# Altium PCB dast.PcbDoc
Units mm, origin at the board's own origin, x right, y up, seen from the top; angles counter-clockwise.
Board outline 151 x 86.38 mm, 2 copper layers (Top Layer, Bottom Layer); 47 components, 52 nets, 143 pads, 0 vias.
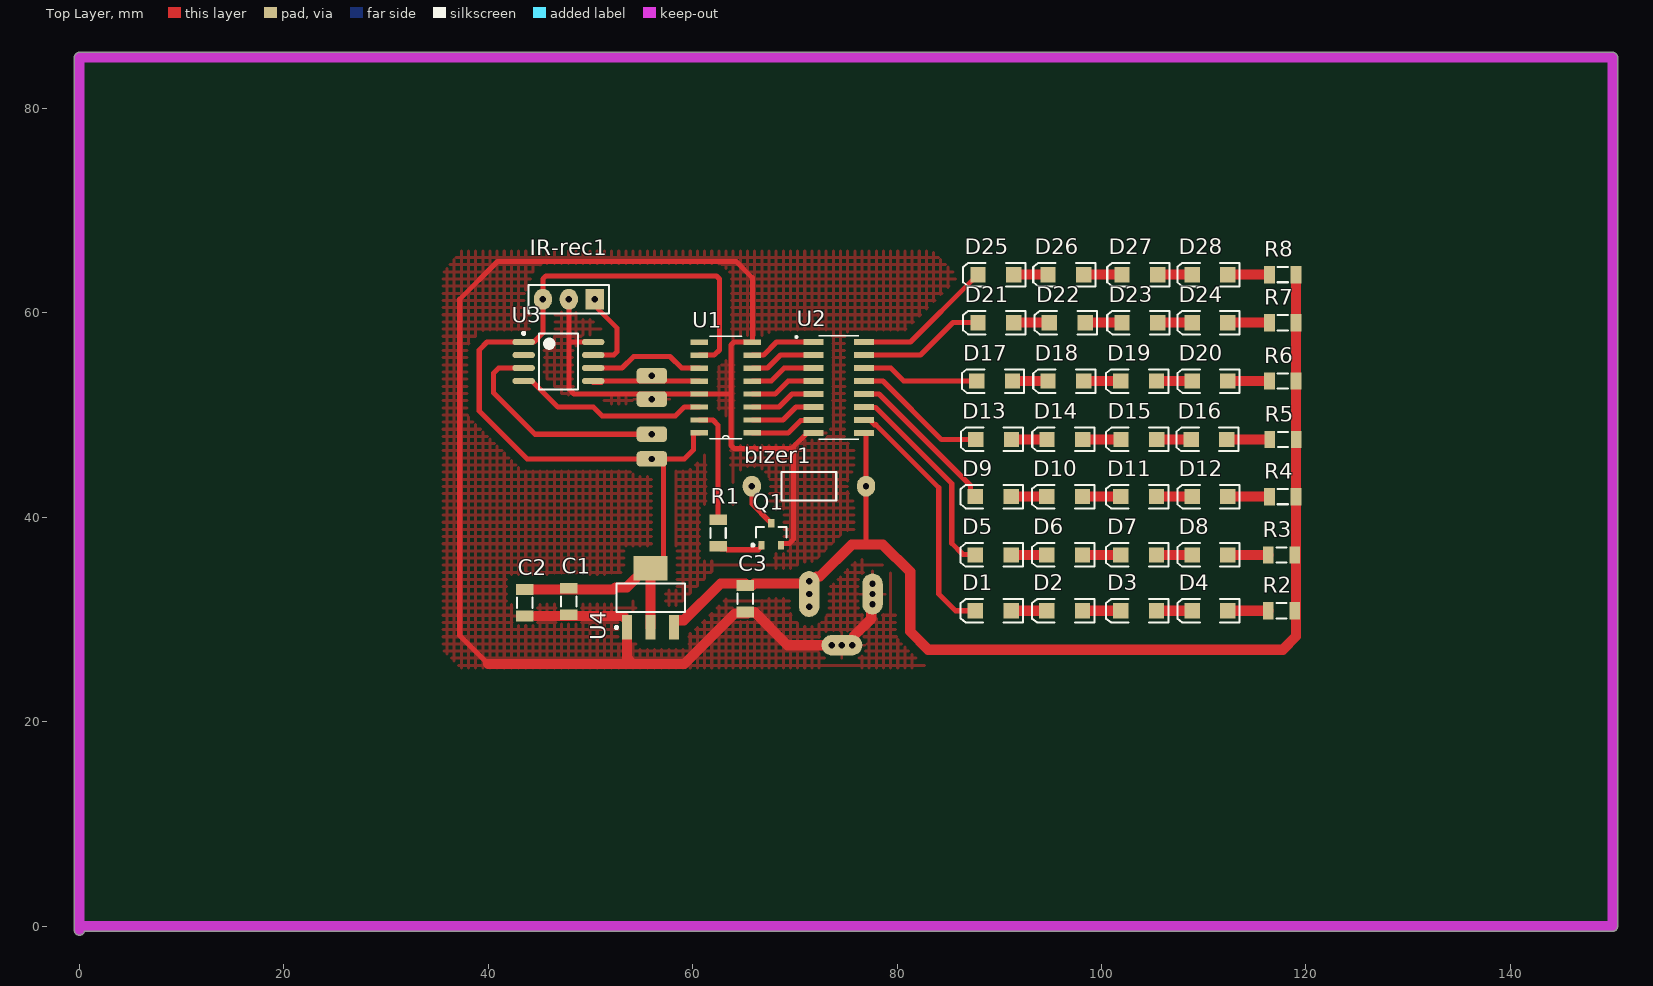
[diagram p0: Top Layer view]
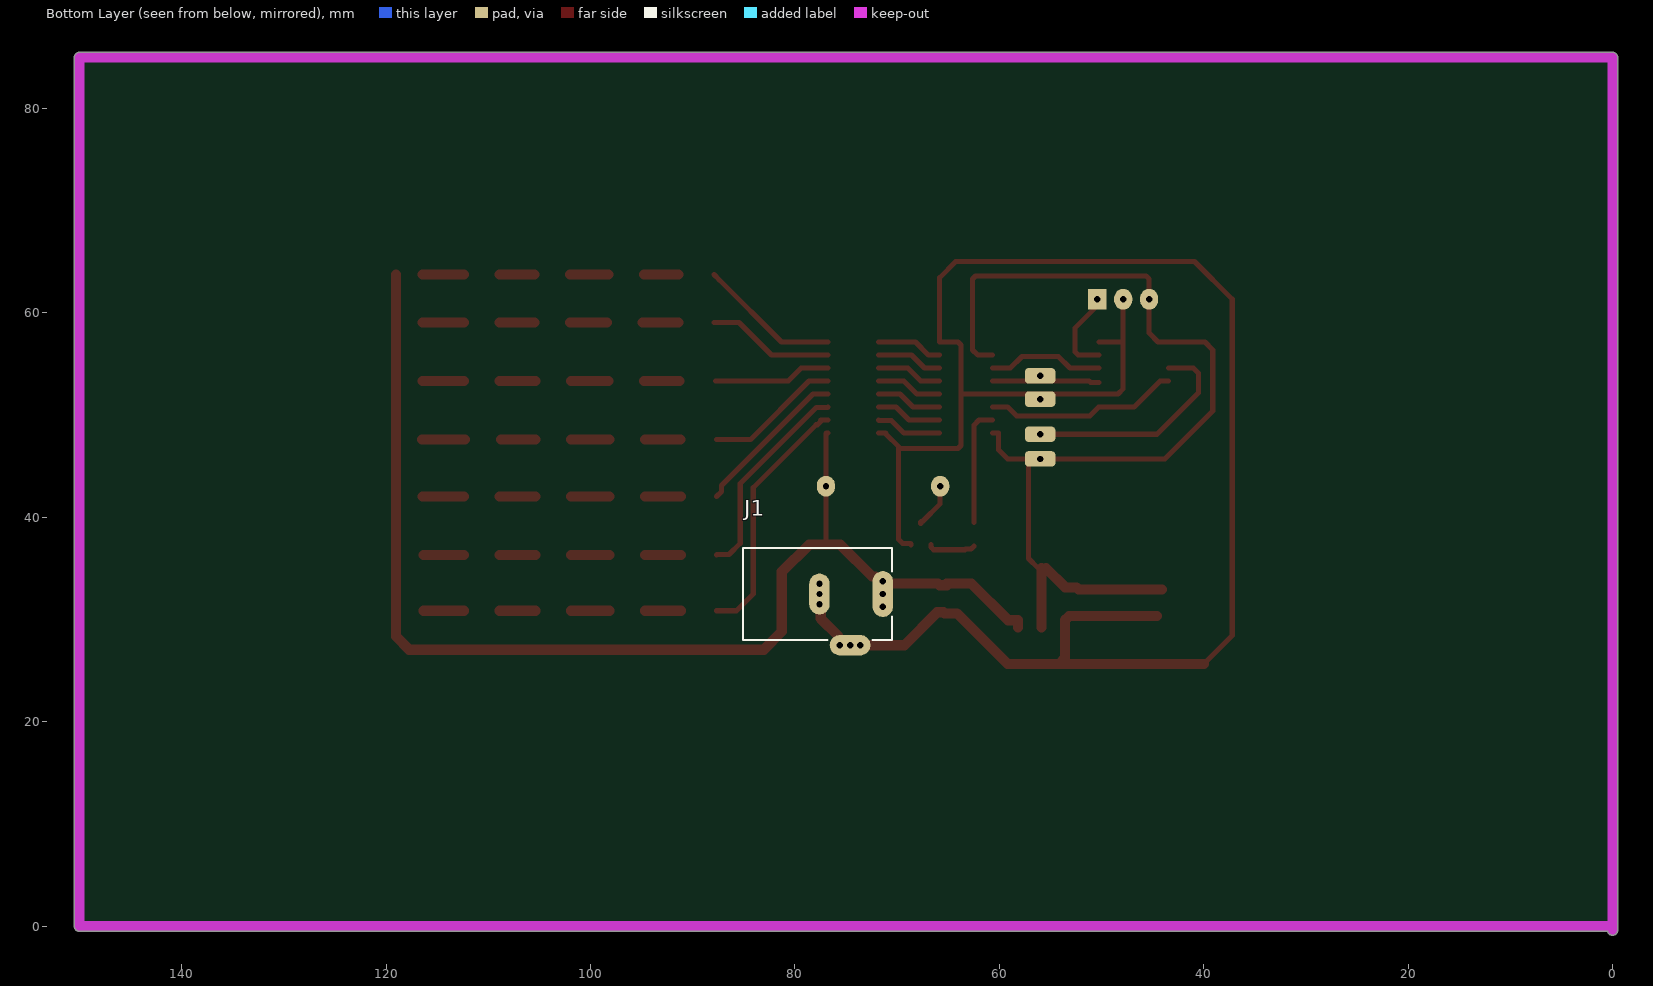
[diagram p1: Bottom Layer view, seen from below]

## Layer stack, top to bottom
Top Solder: solder mask 0.0102, Solder Resist, Dk 3.5
Top Layer: signal copper 0.0356
Dielectric 1: dielectric 0.32, FR-4, Dk 4.8
Bottom Layer: signal copper 0.0356
Bottom Solder: solder mask 0.0102, Solder Resist, Dk 3.5

## Board outline
-0.5,-0.381 -0.5,85 cw(c0,85) 0,85.5 150,85.5 cw(c150,85) 150.5,85 150.5,0 cw(c150,0) 150,-0.5 0.486,-0.5 cw(c0,-0.381)

## Design rules (kind name [scope] priority, off if disabled: settings)
Clearance Clearance_1 [InPolygon] p1: gap=0.8 ignorepadtopadclearanceinfootprint=FALSE
Clearance [All] p2: gap=0.254 ignorepadtopadclearanceinfootprint=FALSE except(0: Arc-Hole Track-Hole SMDPad-Hole THPad-Hole Via-Hole Fill-Hole Poly-Hole Region-Hole Text-Hole)
PolygonConnect [All] p1: connectstyle=Relief reliefconductorwidth=0.254 reliefentries=4 polygonreliefangle="90 Angle" airgapwidth=0.254
RoomDefinition dast [InComponentClass('dast')] p1: confinementstyle=ConfineIn formatcopy=TRUE lockcomponents=FALSE outline 151.638,0.762 662.178,0.762 662.178,38.862 151.638,38.862
RoutingLayers [All] p1: top layer_v5=FALSE bottom layer_v5=TRUE
RoutingVias [All] p1: holewidth=0.711 width=2.5 viastyle="Through Hole" minholewidth=0.711 minwidth=1.27 maxholewidth=0.711 maxwidth=2
SolderMaskExpansion [All] p1: expansion=0.102 istentingtop=FALSE
Width [All] p1: maxlimit=3 minlimit=0.5 preferedwidth=1
29 further rules are at their usual default settings.

## Components (designator, comment, footprint, x,y, rotation, side; value= is the part's Value field where it differs from the comment)
bizer1 "Header2X1" "Header 2X1" 71.374,43.053 r180 top
C1 "=Value" "CAP 1206" 47.879,31.75 r90 top
C2 "=Value" "CAP 1206" 43.561,31.623 r90 top
C3 "=Value" "CAP 1206" 65.151,32.004 r90 top
D1 "LED2" 3.2X1.6X1.1 89.408,30.861 r180 top
D2 "LED2" 3.2X1.6X1.1 96.393,30.861 r180 top
D3 "LED2" 3.2X1.6X1.1 103.632,30.861 r180 top
D4 "LED2" 3.2X1.6X1.1 110.617,30.861 r180 top
D5 "LED2" 3.2X1.6X1.1 89.408,36.322 r180 top
D6 "LED2" 3.2X1.6X1.1 96.393,36.322 r180 top
D7 "LED2" 3.2X1.6X1.1 103.632,36.322 r180 top
D8 "LED2" 3.2X1.6X1.1 110.617,36.322 r180 top
D9 "LED2" 3.2X1.6X1.1 89.408,42.037 r180 top
D10 "LED2" 3.2X1.6X1.1 96.393,42.037 r180 top
D11 "LED2" 3.2X1.6X1.1 103.632,42.037 r180 top
D12 "LED2" 3.2X1.6X1.1 110.617,42.037 r180 top
D13 "LED2" 3.2X1.6X1.1 89.436,47.625 r180 top
D14 "LED2" 3.2X1.6X1.1 96.421,47.625 r180 top
D15 "LED2" 3.2X1.6X1.1 103.66,47.625 r180 top
D16 "LED2" 3.2X1.6X1.1 110.518,47.625 r180 top
D17 "LED2" 3.2X1.6X1.1 89.535,53.34 r180 top
D18 "LED2" 3.2X1.6X1.1 96.52,53.34 r180 top
D19 "LED2" 3.2X1.6X1.1 103.632,53.34 r180 top
D20 "LED2" 3.2X1.6X1.1 110.617,53.34 r180 top
D21 "LED2" 3.2X1.6X1.1 89.662,59.055 r180 top
D22 "LED2" 3.2X1.6X1.1 96.647,59.055 r180 top
D23 "LED2" 3.2X1.6X1.1 103.759,59.055 r180 top
D24 "LED2" 3.2X1.6X1.1 110.617,59.055 r180 top
D25 "LED2" 3.2X1.6X1.1 89.662,63.754 r180 top
D26 "LED2" 3.2X1.6X1.1 96.52,63.754 r180 top
D27 "LED2" 3.2X1.6X1.1 103.759,63.754 r180 top
D28 "LED2" 3.2X1.6X1.1 110.617,63.754 r180 top
IR-rec1 "Header3X1" "HEADER 3X1" 50.419,61.341 r180 top
J1 "PWR2.5" KLD-0202 85.097,32.496 r180 bottom
Q1 "QNPN" SOT-23B_L 67.691,38.354 r90 top
R1 "10K" "RES 1206 (3216X08L)" 62.484,38.481 r270 top
R2 "10K" "RES 1206 (3216X08L)" 117.602,30.861 r0 top
R3 "10K" "RES 1206 (3216X08L)" 117.602,36.322 r0 top
R4 "10K" "RES 1206 (3216X08L)" 117.729,42.037 r0 top
R5 "10K" "RES 1206 (3216X08L)" 117.757,47.625 r0 top
R6 "10K" "RES 1206 (3216X08L)" 117.729,53.34 r0 top
R7 "10K" "RES 1206 (3216X08L)" 117.729,59.055 r0 top
R8 "10K" "RES 1206 (3216X08L)" 117.729,63.754 r0 top
U1 "74HC595D-Q100,118" SOIC127P600X175-16N#1 63.246,52.705 r180 top
U2 "ULN2003ADRG4" SOIC127P600X175-16N#2 74.295,52.705 r0 top
U3 "ATtiny15L-1SC" 8S2_N 46.863,55.245 r0 top
U4 "LM1117MP-3.3" MP04A_N 55.88,32.131 r90 top

## Footprints (in the part's own frame and the unit in brackets; to place one, negate y for a bottom-side part, rotate by r counter-clockwise, add the part's x,y. Pads: shape width x height; smd on the part's side, far side on the other; paste and mask are expansions set on the pad)
3.2X1.6X1.1 [mm] "SMT LED; 2 Flat Leads"
  rect 1.5x1.5 smd: 1(-1.75,0) 2(1.75,0)
  silkscreen extent -2.9,-1.15 3.2,1.15
8S2_N [mm] "SOP, 8-Leads, Body 5.3x5.3mm, Pitch 1.27mm, IPC Medium Density"
  oval 2.2x0.6 smd: 1(-3.4,1.905) 2(-3.4,0.635) 3(-3.4,-0.635) 4(-3.4,-1.905) 5(3.4,-1.905) 6(3.4,-0.635) 7(3.4,0.635) 8(3.4,1.905)
  silkscreen extent -3.52,-2.75 1.9,2.88, body extent -2.73,-2.75 2.73,2.75, height 2.16
"CAP 1206" [mm]
  rect 1.05x1.7 smd: 1(-1.27,0) 2(1.326,0)
  silkscreen extent -0.47,-0.75 0.53,0.75, body extent -1.49,-0.77 1.55,0.75, height 0.75
"Header 2X1" [mil]
  oval 70x80 hole 24.41: 1(-220,0) 2(220,0)
  silkscreen extent -105,-55 105,55, body extent -100,-50 100,50, height 374
"HEADER 3X1" [mil]
  rect 70x80 hole 24.41: 1(0,0)
  oval 70x80 hole 24.41: 2(100,0) 3(200,0)
  silkscreen extent -55,-55 255,55, body extent -49,-50 251,50, height 330
KLD-0202 [mm] "DC Power Jack, 2.5mm, KLD Series, PCB Mount"
  oval 2x4.5 hole 0.62: 1(13.7,0)
  round 1.5 hole 0.62: 1A(13.7,-1.25) 1B(13.7,1.25) 2A(7.5,-1) 2B(7.5,1) 3A(9.5,-5) 3B(11.5,-5)
  oval 2x4 hole 0.62: 2(7.5,0)
  oval 4x2 hole 0.62: 3(10.5,-5)
  silkscreen extent 0,-4.5 14.6,4.5
MP04A_N [mm] "SOT223, 4-Leads, Body 6.5x3.5mm, Pitch 2.3mm, Lead Span 7mm, IPC Medium Density"
  rect 2.4x1 smd: 1(-2.9,2.3) 2(-2.9,0) 3(-2.9,-2.3)
  rect 2.4x3.3 smd: 4(2.9,0)
  silkscreen extent -3.02,-3.35 1.4,3.47, body extent -1.85,-3.35 1.85,3.35, height 1.8
"RES 1206 (3216X08L)" [mm] "Chip Resistor, 2-Leads, Body 3.2x1.6mm, IPC High Density _ (0.125 W)"
  rect 1.05x1.7 smd: 1(-1.295,0) 2(1.301,0)
  silkscreen extent -0.5,-0.75 0.5,0.75, body extent -1.52,-0.76 1.53,0.76, height 0.6
SOIC127P600X175-16N#1 [mil]
  rect 67x21 smd: 1(-102,175) 2(-102,125) 3(-102,75) 4(-102,25) 5(-102,-25) 6(-102,-75) 7(-102,-125) 8(-102,-175) 9(102,-175) 10(102,-125) 11(102,-75) 12(102,-25) 13(102,25) 14(102,75) 15(102,125) 16(102,175)
  silkscreen extent -62,-197 62,197, body extent -118,-170 118,170, height 69
SOIC127P600X175-16N#2 [mil]
  rrect25% 77.56x23.62 smd: 1(-97.44,175) 2(-97.44,125) 3(-97.44,75) 4(-97.44,25) 5(-97.44,-25) 6(-97.44,-75) 7(-97.44,-125) 8(-97.44,-175) 9(97.44,-175) 10(97.44,-125) 11(97.44,-75) 12(97.44,-25) 13(97.44,25) 14(97.44,75) 15(97.44,125) 16(97.44,175)
  silkscreen extent -167,-199 77,199
SOT-23B_L [mm] "SOT23, 3-Leads, Body 2.9x1.3mm, Pitch 0.95mm, Lead Span 2.4mm, IPC High Density"
  rect 0.85x0.6 smd: 1(-1.075,0.95) 2(-1.075,-0.95) 3(1.075,0)
  silkscreen extent -1.2,-1.5 0.7,1.92, body extent -0.7,-1.5 0.7,1.5, height 1.14

## Part data
C1 C2 C3: library part Capacitor, "Capacitor"
D1 D2 D3 D4 D5 D6 D7 D8 D9 D10 D11 D12 D13 D14 D15 D16 D17 D18 D19 D20 D21 D22 D23 D24 D25 D26 D27 D28: "Typical RED, GREEN, YELLOW, AMBER GaAs LED", LatestRevisionDate=17-Jul-2002, LatestRevisionNote="Re-released for DXP Platform.", PackageDescription="SM LED; 2 Flat Leads", PackageReference=3.2X1.6X1.1, PackageVersion=Feb-2002, Published=8-Jun-2000, Publisher="Altium Limited"
J1: "Low Voltage Power Supply Connector", ComponentLink1Description="Manufacturer Link", ComponentLink1URL=http://domino.kycon.com/internet/Products.html, DatasheetDocument=09-May-2002, Published=17-Dec-2003, Publisher="Altium Limited"
Q1: "NPN Bipolar Transistor", LatestRevisionDate=29-May-2009, LatestRevisionNote="IPC-7351 Footprint Added.", PackageDescription="3-Pin SOT-23 Package 0.95 mm Pitch, 2.4 mm Lead Span", PackageReference=SOT-23B, PackageVersion=Aug-1999, Published=8-Jun-2000, Publisher="Altium Limited"
R1 R2 R3 R4 R5 R6 R7 R8: library part Resistor, "Resistor", Power="1/4 W", Tolerance=5%
U1: "Shift Shift Register 1 Element 8 Bit 16-SO", Package="SO16-16 Nexperia USA Inc.", Availability=Warning, Check_prices=https://www.snapeda.com/parts/74HC595D-Q100,118/Nexperia/view-part/1041587/?ref=eda, MF="Nexperia USA", MP=74HC595D-Q100,118, Price=None, Purchase-URL=https://pricing.snapeda.com/search/part/74HC595D-Q100,118/?ref=eda, SnapEDA_Link=https://www.snapeda.com/parts/74HC595D-Q100,118/Nexperia/view-part/1041587/?ref=snap
U2: "50-V, 7-ch darlington transistor array, -20C to 70C 16-SOIC -40 to 70", Package=None, Availability=Unavailable, MP=ULN2003ADRG4, Price=None
U3: "8-Bit AVR Microcontroller with 1K Byte of Flash Memory", Supplier Part Number 1=ATTINY15L-1SC-ND, ComponentLink1Description=Datasheet, ComponentLink1URL=http://www.atmel.com/dyn/resources/prod_documents/doc1187.pdf, ComponentLink2Description="Atmel.com Home", ComponentLink2URL=http://www.atmel.com, DatasheetVersion=1187E-AVR-06/02, LatestRevisionDate=16-Oct-2006, LatestRevisionNote="IPC-7351 Footprint Added.", PackageDescription="8-Lead, 0.208\" Body, Plastic Small Outline Package (EIAJ)", PackageReference=8S2, PackageVersion="revF, Apr-2008", Published=17-Sep-2003, Publisher="Altium Limited", Supplier 1=Digi-Key, Supplier 2=Mouser, Supplier Part Number 2=556-ATTINY15L1SC
U4: "800mA Low-Dropout Linear Regulator", DigiKeyPartNumber=LM1117MP-3.3CT-ND, Manufacturer="National Semiconductor", PackageTopMarking=XYTT*N05A, PowerWise=N, Code_IPC=SOT223-4, Code_JEDEC=TO-261-AA, ComponentLink1Description="LM1117 Datasheet", ComponentLink1URL=http://www.national.com/ds/LM/LM1117.pdf, ComponentLink2Description="LM1117 Web Page", ComponentLink2URL=http://www.national.com/pf/LM/LM1117.html, ComponentLink3Description="MP04A Package Page", ComponentLink3URL=http://www.national.com/packaging/folders/mp04a.html, CompType="LDO IC", DatasheetVersion=Apr-2006, PackageDescription="Molded SOT-223, 6.50 x 3.56 x 1.6mm Body, 4 Lead, 2.3mm Pitch", PackageReference=MP04A, PackageVersion="revB, Apr-2003", PartNumber=LM1117MP-3.3, PinCount=4, Published=4-Dec-2008, Publisher="Altium Limited", RoHS=O

## Free pads (board coordinates)
  rrect50% 3x1.524 hole 0.62: 157(56.007,53.848) 159(56.007,51.562) 160(56.007,45.72)
  rrect50% 3x1.5 hole 0.62: 158(56.007,48.133)

## Nets (pads, with @x,y where several pads share a name; then routed paths per layer and width w, separated by ;. In a path a pad name is that pad's centre, name@x,y a point inside that pad or via, vN(x,y) a via of type N, cw(c..) or ccw(c..) an arc to the next point about the centre after c; other vN are vias at no path point)
bizer: R1.1 U1.15 | length 11.6
  Top Layer w0.5: U1.15 61.976,49.53 62.484,49.022 R1.1@62.484,39.501
ds: U1.14 U3.4 | length 19
  Top Layer w0.5: U3.4 44.263,53.34 46.803,50.8 50.266,50.8 51.155,49.911 58.293,49.911 59.182,50.8 U1.14
GND: C1.1 C2.1 C3.1 IR-rec1.2 J1.2 J1.2A J1.2B J1.3 J1.3A J1.3B pad.159 Q1.2 U1.8 U1.13 U2.8 U3.8 U4.1 | length 190.9
  Top Layer w0.5: 40.005,25.654 37.211,28.448 37.211,61.341 40.894,65.024 64.262,65.024 65.837,63.449 U1.8 64.047,57.15 63.754,56.857 63.754,47.029 64.047,46.736 69.686,46.736 69.85,46.9 ; IR-rec1.2 47.879,57.169 ; U3.8@50.263,57.169 47.879,57.169 ; 63.671,52.07 U1.13 48.387,52.07 47.879,52.578 47.879,57.169 ; Q1.2 68.641,37.404 68.691,37.454 69.458,37.454 69.85,37.846 69.85,46.9 ; U2.8 71.135,48.26 71.085,48.21 71.085,48.135 69.85,46.9
  Top Layer w1: 40.005,25.654 54.166,25.654 ; 44.577,30.353 53.158,30.353 53.58,29.931 U4.1 53.58,26.24 54.166,25.654 ; J1.2 77.597,31.767 77.464,31.634 77.464,30.093 75.788,28.417 75.788,27.958 75.326,27.496 J1.3B 69.278,27.496 66.065,30.709 65.474,30.709 65.372,30.607 64.135,30.607 59.182,25.654 54.166,25.654
ir-r: IR-rec1.1 U3.7 | length 8.5
  Top Layer w0.5: U3.7 52.285,55.88 52.578,56.173 52.578,58.547 50.419,60.706 IR-rec1.1
Netbizer1_2: bizer1.2 Q1.3 | length 4.5
  Top Layer w0.5: bizer1.2 65.786,41.334 67.516,39.604 67.641,39.604 67.691,39.554 Q1.3
NetD1_1: D1.1 D2.2 | length 3.5
  Top Layer w1: D1.1 D2.2
NetD2_1: D2.1 D3.2 | length 3.7
  Top Layer w1: D2.1 D3.2
NetD3_1: D3.1 D4.2 | length 3.5
  Top Layer w1: D3.1 D4.2
NetD4_1: D4.1 R2.1 | length 3.9
  Top Layer w1: D4.1 R2.1
NetD5_1: D5.1 D6.2 | length 3.5
  Top Layer w1: D5.1 D6.2
NetD6_1: D6.1 D7.2 | length 3.7
  Top Layer w1: D6.1 D7.2
NetD7_1: D7.1 D8.2 | length 3.5
  Top Layer w1: D7.1 D8.2
NetD8_1: D8.1 R3.1 | length 3.9
  Top Layer w1: D8.1 R3.1
NetD9_1: D9.1 D10.2 | length 3.5
  Top Layer w1: D9.1 D10.2
NetD10_1: D10.1 D11.2 | length 3.7
  Top Layer w1: D10.1 D11.2
NetD11_1: D11.1 D12.2 | length 3.5
  Top Layer w1: D11.1 D12.2
NetD12_1: D12.1 R4.1 | length 4.1
  Top Layer w1: D12.1 R4.1
NetD13_1: D13.1 D14.2 | length 3.5
  Top Layer w1: D13.1 D14.2
NetD14_1: D14.1 D15.2 | length 3.7
  Top Layer w1: D14.1 D15.2
NetD15_1: D15.1 D16.2 | length 3.4
  Top Layer w1: D15.1 D16.2
NetD16_1: D16.1 R5.1 | length 4.2
  Top Layer w1: D16.1 R5.1
NetD17_1: D17.1 D18.2 | length 3.5
  Top Layer w1: D17.1 D18.2
NetD18_1: D18.1 D19.2 | length 3.6
  Top Layer w1: D18.1 D19.2
NetD19_1: D19.1 D20.2 | length 3.5
  Top Layer w1: D19.1 D20.2
NetD20_1: D20.1 R6.1 | length 4.1
  Top Layer w1: D20.1 R6.1
NetD21_1: D21.1 D22.2 | length 3.5
  Top Layer w1: D21.1 D22.2
NetD22_1: D22.1 D23.2 | length 3.6
  Top Layer w1: D22.1 D23.2
NetD23_1: D23.1 D24.2 | length 3.4
  Top Layer w1: D23.1 D24.2
NetD24_1: D24.1 R7.1 | length 4.1
  Top Layer w1: D24.1 R7.1
NetD25_1: D25.1 D26.2 | length 3.4
  Top Layer w1: D25.1 D26.2
NetD26_1: D26.1 D27.2 | length 3.7
  Top Layer w1: D26.1 D27.2
NetD27_1: D27.1 D28.2 | length 3.4
  Top Layer w1: D27.1 D28.2
NetD28_1: D28.1 R8.1 | length 4.1
  Top Layer w1: D28.1 R8.1
NetQ1_2: Q1.1 R1.2 | length 4.7
  Top Layer w0.5: R1.2 62.759,36.905 63.301,36.905 63.377,36.83 66.417,36.83 66.691,37.104 Q1.1@66.691,37.344
O1: U1.1 U2.7 | length 6.5
  Top Layer w0.5: U1.1 69.342,48.26 70.562,49.48 71.77,49.48 U2.7
O2: U1.2 U2.6 | length 6.5
  Top Layer w0.5: U1.2 68.834,49.53 70.104,50.8 U2.6
O3: U1.3 U2.5 | length 6.5
  Top Layer w0.5: U1.3 68.453,50.8 69.723,52.07 U2.5
o4: U1.4 U2.4 | length 6.5
  Top Layer w0.5: U1.4 68.072,52.07 69.342,53.34 U2.4
o5: U1.5 U2.3 | length 6.5
  Top Layer w0.5: U1.5 67.691,53.34 68.961,54.61 U2.3
o6: U1.6 U2.2 | length 6.5
  Top Layer w0.5: U1.6 67.31,54.61 68.58,55.88 U2.2
o7: U1.7 U2.1 | length 6.5
  Top Layer w0.5: U1.7 65.854,55.897 66.946,55.897 68.199,57.15 U2.1
oo1: D1.2 U2.10 | length 24.8
  Top Layer w0.5: U2.10 77.455,49.53 77.505,49.48 77.505,49.357 77.798,49.064 77.92,49.064 84.074,42.91 84.074,32.512 85.725,30.861 D1.2
oo2: D5.2 U2.11 | length 20.3
  Top Layer w0.5: U2.11 76.82,50.75 77.901,50.75 85.344,43.307 85.344,37.465 86.451,36.358 87.622,36.358 D5.2
oo3: D9.2 U2.12 | length 15.4
  Top Layer w0.5: U2.12 78.232,52.07 87.181,43.121 87.181,42.514 D9.2
oo4: D13.2 U2.13 | length 13.3
  Top Layer w0.5: U2.13 78.613,53.34 84.328,47.625 D13.2
oo5: D17.2 U2.14 | length 11.5
  Top Layer w0.5: U2.14 79.375,54.61 80.645,53.34 D17.2
oo6: D21.2 U2.15 | length 12.5
  Top Layer w0.5: U2.15 82.296,55.88 85.471,59.055 D21.2
oo7: D25.2 U2.16 | length 13.9
  Top Layer w0.5: U2.16 81.308,57.15 87.412,63.254 D25.2
sh: U1.11 U3.6 | length 11.3
  Top Layer w0.5: U3.6 53.086,54.61 54.229,55.753 57.785,55.753 58.928,54.61 U1.11
st: pad.157 U1.12 U3.5 | length 10.4
  Top Layer w0.5: U3.5@50.263,53.213 51.09,53.213 51.217,53.34 U1.12
VCC: bizer1.1 C3.2 J1.1 J1.1A J1.1B R2.2 R3.2 R4.2 R5.2 R6.2 R7.2 R8.2 U2.9 U4.3 | length 120.9
  Top Layer w0.5: J1.1B@71.684,33.599 71.684,33.762 J1.1B@71.684,33.937 ; U2.9 76.912,48.26 76.962,48.21 bizer1.1 76.962,37.465 76.835,37.338
  Top Layer w1: U4.3 58.18,29.931 59.141,29.931 62.738,33.528 C3.2@65.151,33.528 ; C3.2 65.176,33.355 65.844,33.355 66.017,33.528 J1.1B@71.45,33.528 ; J1.1 71.397,33.475 J1.1B@71.45,33.528 ; J1.1B@71.684,33.762 72.147,34.226 72.453,34.226 75.565,37.338 76.835,37.338 78.613,37.338 81.28,34.671 81.28,28.829 83.058,27.051 117.729,27.051 119.03,28.352 119.03,30.861 119.03,36.322 R4.2 R6.2 R7.2 R8.2 ; J1.1B@71.839,33.528 J1.1B@71.45,33.528
vDD: C1.2 C2.2 IR-rec1.3 pad.160 U1.10 U1.16 U3.1 U4.2 U4.4 | length 99.7
  Top Layer w0.5: U4.4 56.2,35.031 57.15,35.981 pad.160@57.15,45.72 ; U1.16 60.083,48.26 60.066,48.243 60.066,46.604 59.182,45.72 pad.160@57.15,45.72 ; U1.10 62.103,55.88 62.611,56.388 62.611,63.334 62.318,63.627 45.632,63.627 45.339,63.334 IR-rec1.3 45.339,58.039 44.469,57.169 43.482,57.169 U3.1 39.878,57.15 39.116,56.388 39.116,50.419 43.815,45.72 pad.160 pad.160@57.15,45.72
  Top Layer w1: C2.2@44.069,32.949 52.253,32.949 52.451,33.147 53.546,33.147 U4.4@55.43,35.031 ; U4.2 U4.4
pads on no net: U1.9 U3.2 U3.3
copper on no net: | length 22.2
  Top Layer w0.5: 43.463,54.61 41.021,54.61 40.513,54.102 40.513,52.262 40.513,52.197 44.577,48.133 56.007,48.133

## Polygon pours and split planes (outlines as drawn)
GND on Top Layer "GND_L01_P001" (hatched 90Degree grid 0.7 track 0.3, remove dead copper, pour order 1): 37.465,66.167 37.592,66.04 83.439,66.04 85.725,63.754 85.725,28.575 82.423,25.273 37.338,25.273 35.56,27.051 35.56,63.881

## Keep-outs
Keep-Out Layer:
  lines w1: 0,-0.381 0,85 150,85 150,0 0,0

## Text inside footprints (layer, text, board x,y; h text height)
J1: Mechanical 1 "Alert PCB fab to slot details" at 84.811,38.562 h0.3; Mechanical 1 "Assign keep-out area to slot" at 84.811,39.062 h0.3; Mechanical 1 "Mech 1 - Slot cut-out" at 84.811,38.062 h0.3; Mechanical 1 "Mech 2 - Clearance, move to internal plane if present" at 84.811,37.562 h0.3